# Altium PCB arduino shield.PcbDoc
Units mil, origin at the board's own origin, x right, y up, seen from the top; angles counter-clockwise.
Board outline 2633.58 x 2028.84 mil, 2 copper layers (Top Layer, Bottom Layer); 15 components, 27 nets, 62 pads, 25 vias.
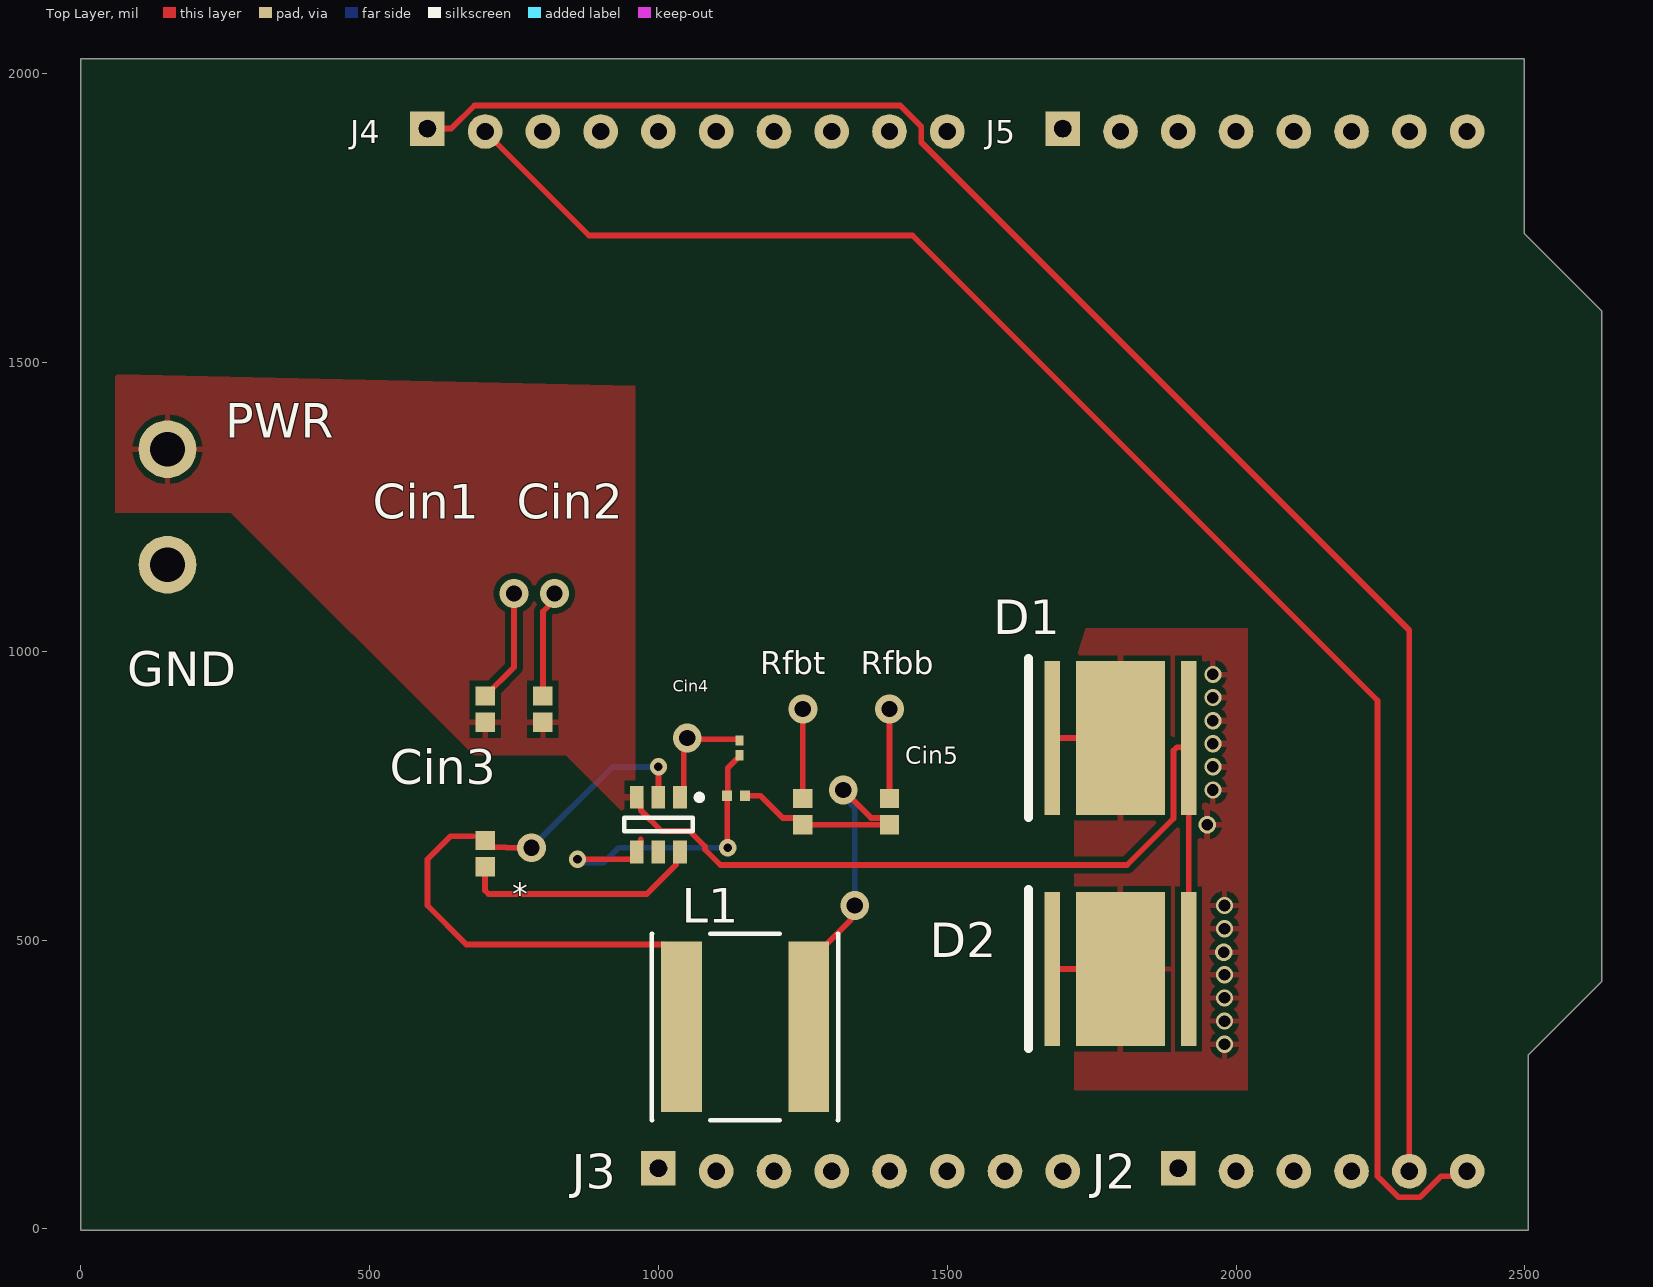
[diagram p0: Top Layer view]
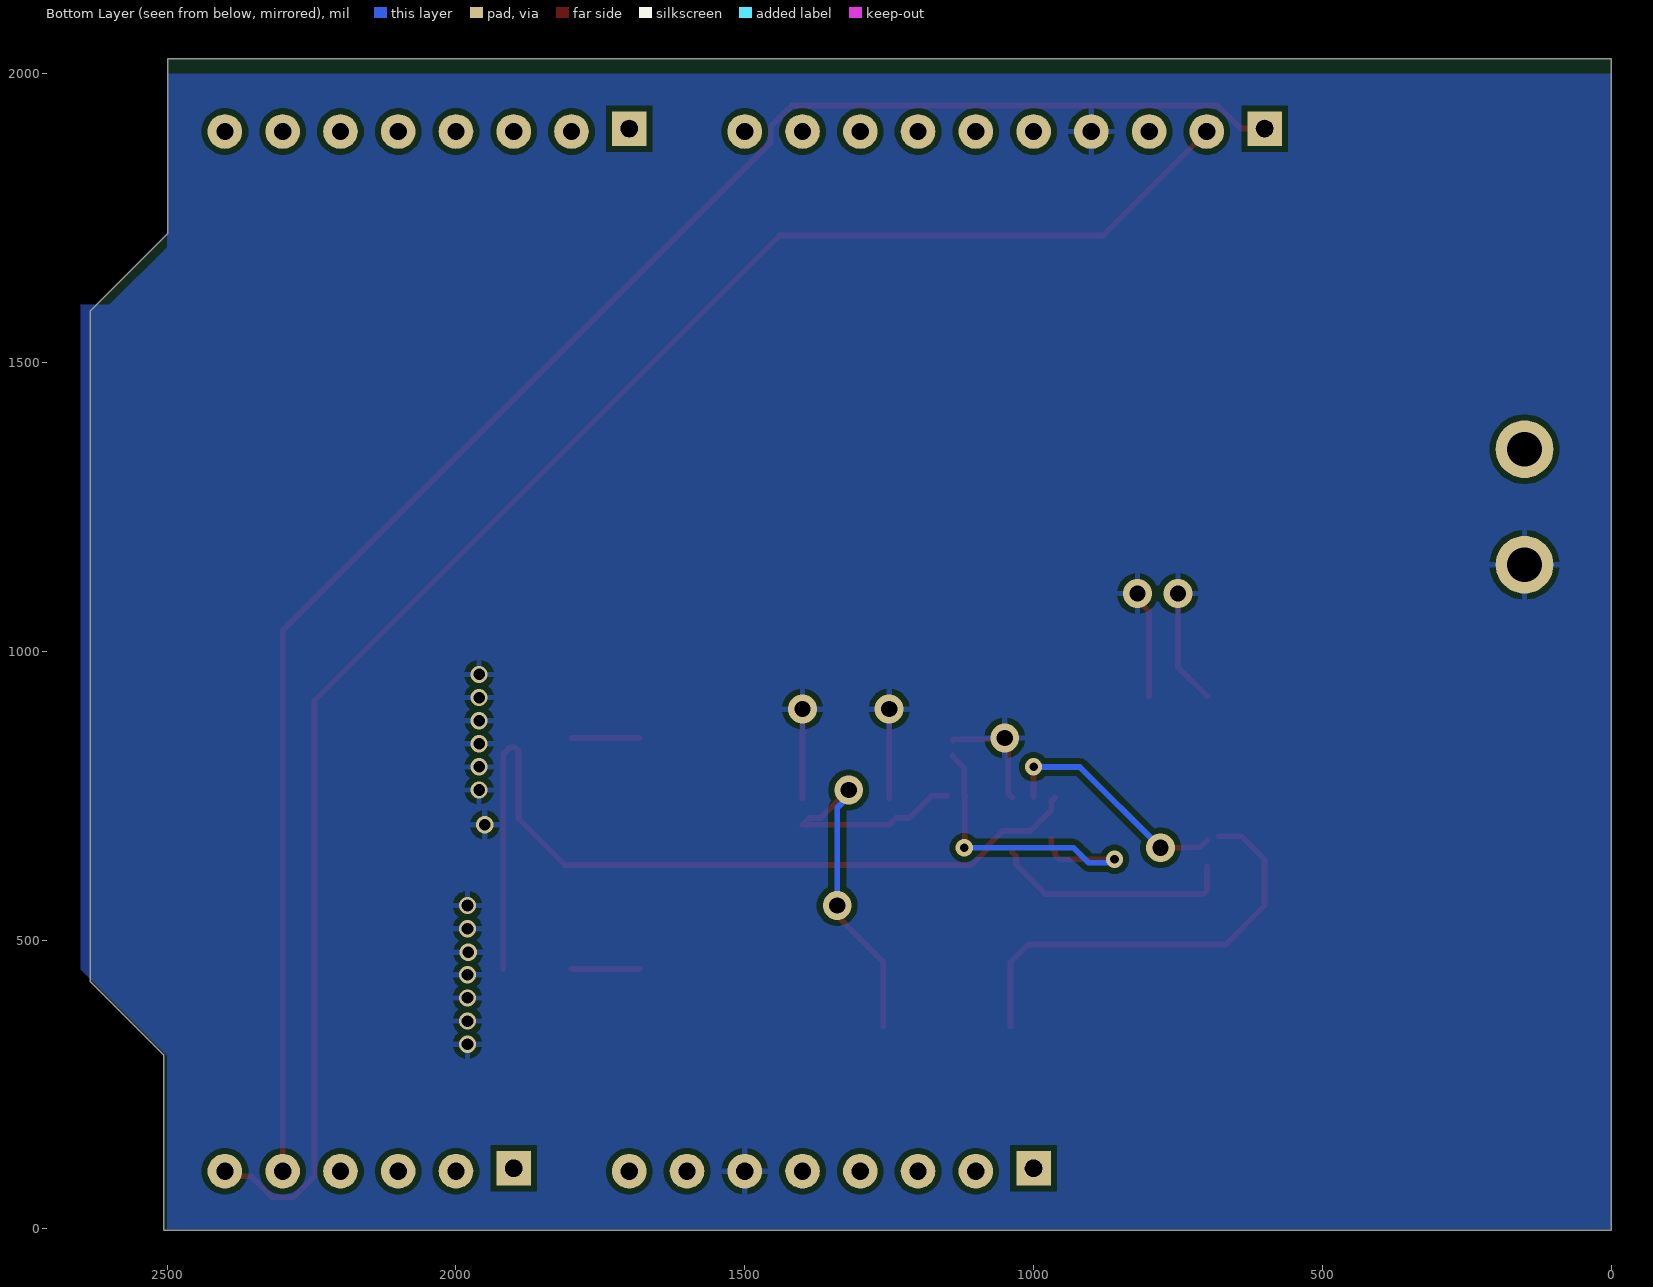
[diagram p1: Bottom Layer view, seen from below]
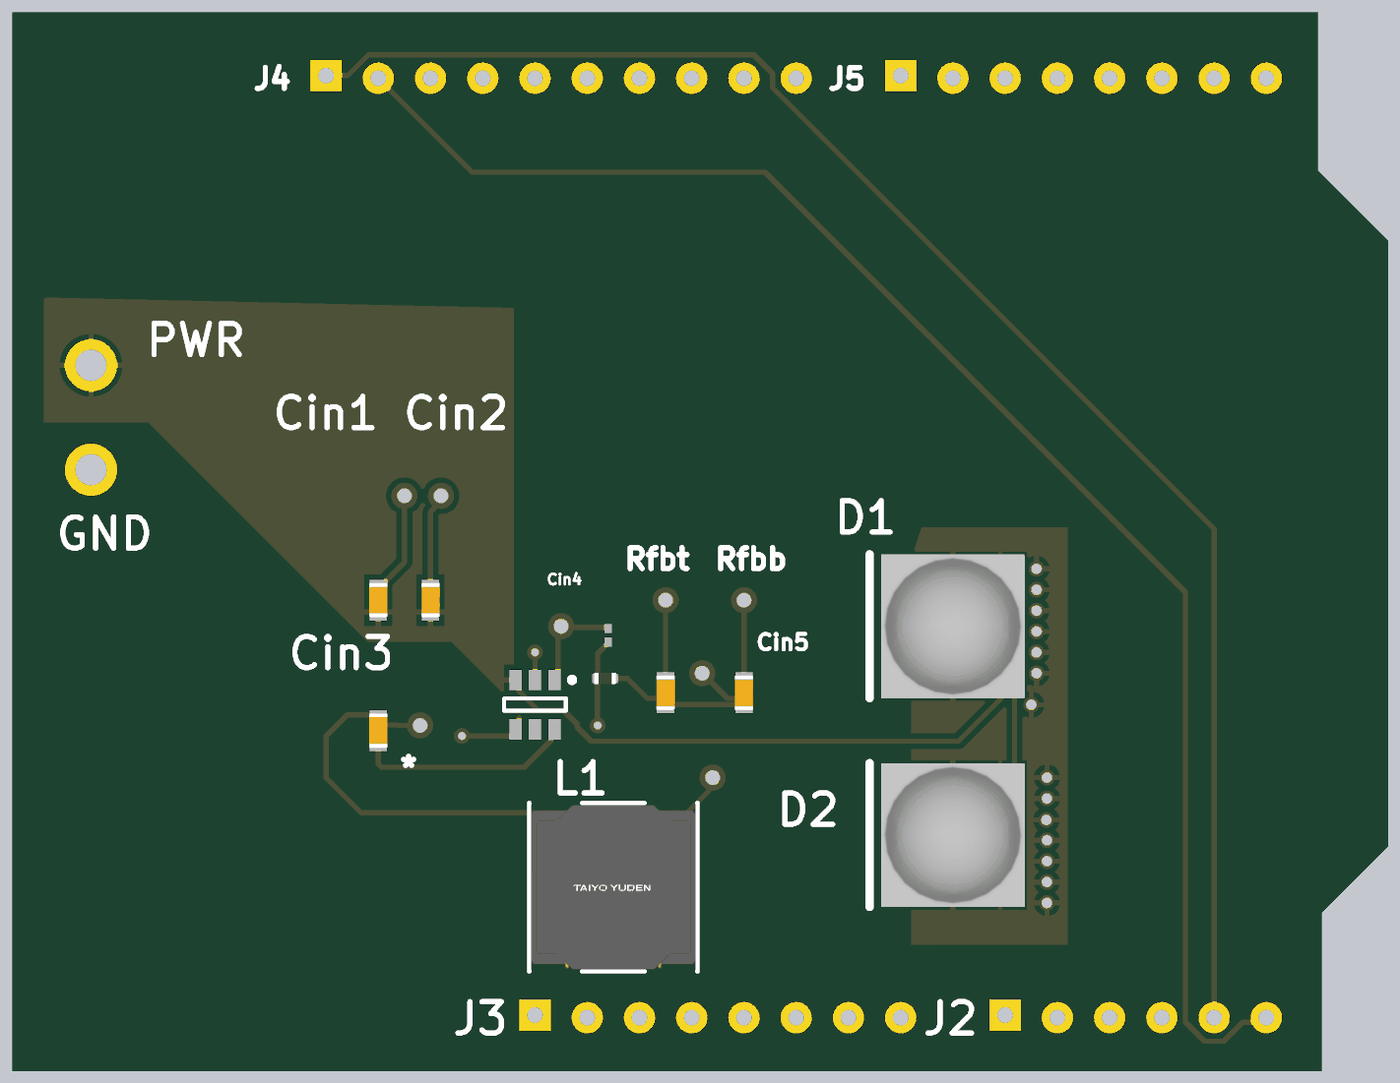
[diagram p2: 3D render of the assembled board from above, using the file's embedded part models]

## Layer stack, top to bottom
Top Solder: solder mask 0.4, Solder Resist, Dk 3.5
Top Layer: signal copper 1.4
Dielectric 1: dielectric 12.6, FR-4, Dk 4.8
Bottom Layer: signal copper 1.4
Bottom Solder: solder mask 0.4, Solder Resist, Dk 3.5

## Board outline
-0.49,-2.47 -0.49,2026.37 2498.82,2026.37 2498.82,1723.33 2633.08,1589.07 2633.08,428.55 2505.86,301.33 2505.86,-2.47

## Design rules (kind name [scope] priority, off if disabled: settings)
Clearance [All] p1: gap=10 ignorepadtopadclearanceinfootprint=FALSE except(0: Arc-Hole Track-Hole SMDPad-Hole THPad-Hole Via-Hole Fill-Hole Poly-Hole Region-Hole Text-Hole; 5: SMDPad-SMDPad)
HoleToHoleClearance [All] p1: gap=5 allowstackedmicrovias=TRUE
MinimumSolderMaskSliver "min solder mask clearance between pads and layers " [OnLayer('Top Layer') vs InPadClass('All Pads')] p1: minsoldermaskwidth=5
MinimumSolderMaskSliver "min solder maks sliver betwene pads " [InPadClass('All Pads') vs InPadClass('All Pads')] p2: minsoldermaskwidth=3
MinimumSolderMaskSliver "min solder mask cleafrance between layers " [OnLayer('Top Layer') vs OnLayer('Bottom Layer')] p3: minsoldermaskwidth=2
PolygonConnect [All] p1: connectstyle=Relief reliefconductorwidth=10 reliefentries=4 polygonreliefangle="90 Angle" airgapwidth=10
RoutingVias [All] p1: holewidth=10 width=18 viastyle="Through Hole" minholewidth=6 minwidth=14 maxholewidth=28 maxwidth=50
SilkToSilkClearance [All] p1: silktosilkclearance=5
SolderMaskExpansion [All] p1: expansion=1 istentingtop=FALSE
Width [All] p1: maxlimit=10 minlimit=10 preferedwidth=10
27 further rules are at their usual default settings.

## Components (designator, comment, footprint, x,y, rotation, side; value= is the part's Value field where it differs from the comment)
* "TPS562200DDCR" SOT95P245X110-6N 1000,700 r270 top
Cin1 "Capacitor 1 uF +/- 10% 25 V 0603" CAPC1608X90X40LL10T20 700,900 r90 top value=1µF
Cin2 "Capacitor 1 uF +/- 10% 25 V 0603" CAPC1608X90X40LL10T20 800,900 r90 top value=1µF
Cin3 "Capacitor 1 uF +/- 10% 25 V 0603" CAPC1608X90X40LL10T20 700,650 r270 top value=1µF
Cin4 "Capacitor 1 uF +/- 10% 25 V 0603" CAPC1608X90X40LL10T20 1250,722.64 r90 top value=1µF
Cin5 "Capacitor 1 uF +/- 10% 25 V 0603" CAPC1608X90X40LL10T20 1400,722.64 r90 top value=1µF
D1 "MKRAWT-00-0000-0D0HG235H" CREE-MK-R-2_V 1800,850 r180 top
D2 "MKRAWT-00-0000-0D0HG235H" CREE-MK-R-2_V 1800,450 r180 top
J2 "samtec_1_6 headers" "samtec_1_6 headers-Footprint-1" 1900,105 r0 top (schematic designator "6 pin connector")
J3 "1_8 pin headeer" "1_8_Pin headers-Footprint-1"#1 1300,105 r0 top (schematic designator "8 pin connector")
J4 "10 pin connector" "10 pin connector-Footprint-1" 855,1605 r0 top (schematic designator "10 pin connector")
J5 "1_8 pin headeer" "1_8_Pin headers-Footprint-1"#2 2000,1905 r0 top (schematic designator "8 pin connector_2")
L1 "NRS8030T3R3MJGJ" FP-NRS8030-MFG 1150,350 r0 top
Rfbb "ERJ2RKF1002X" RESC1005X40X25LL05T05 1134.25,750 r180 top
Rfbt "CRCW020156K2FNED" RESC0603X28X15NL05T05 1140,832.8 r90 top

## Footprints (in the part's own frame and the unit in brackets; to place one, negate y for a bottom-side part, rotate by r counter-clockwise, add the part's x,y. Pads: shape width x height; smd on the part's side, far side on the other; paste and mask are expansions set on the pad)
"1_8_Pin headers-Footprint-1"#1 [mil]
  rect 60x60 hole 30: 1(-300,0)
  round 60 hole 30: 2(-200,-5) 3(-100,-5) 4(0,-5) 5(100,-5) 6(200,-5) 7(300,-5) 8(400,-5)
"1_8_Pin headers-Footprint-1"#2 [mil]
  rect 60x60 hole 30: 1(-300,0)
  round 60 hole 30: 2(-200,-5) 3(-100,-5) 4(0,-5) 5(100,-5) 6(200,-5) 7(300,-5) " "(400,-5)
"10 pin connector-Footprint-1" [mil]
  rect 60x60 hole 30: 1(-255,300)
  round 60 hole 30: 2(-155,295) 3(-55,295) 4(45,295) 5(145,295) 6(245,295) 11(345,295) 12(445,295) 13(545,295) 14(645,295)
CAPC1608X90X40LL10T20 [mm] "Chip Capacitor, 2-Leads, Body 1.70x0.90mm, IPC High Density"
  rect 0.85x0.85 smd: 1(-0.575,0) 2(0.575,0)
  body extent -0.85,-0.45 0.85,0.45, height 0.9
CREE-MK-R-2_V [mm] "SMD, 2-Leads, Body 7x7mm, Thermal Pad 3.9x6.76mm"
  rect 0.7x6.76 smd: 1(-3,0) 2(3,0)
  rect 3.9x6.76 smd: 3(0,0)
  silkscreen extent 4.05,-3.5 4.05,3.5, body extent -3.5,-3.5 3.5,3.5, height 4.1
FP-NRS8030-MFG [mm]
  rect 1.8x7.5 smd paste+0 mask+0: 1(-2.8,0) 2(2.8,0)
  silkscreen extent -4.1,-4.1 4.1,4.1, body extent -4.2,-4.2 4.2,4.2, height 0.25
RESC0603X28X15NL05T05 [mm] "Chip Resistor, 2-Leads, Body 0.60x0.30mm, IPC Medium Density"
  rect 0.45x0.35 smd: 1(-0.325,0) 2(0.325,0)
  body extent -0.33,-0.17 0.33,0.18, height 0.28
RESC1005X40X25LL05T05 [mm] "Chip Resistor, 2-Leads, Body 1.05x0.55mm, IPC High Density"
  rect 0.45x0.45 smd: 1(-0.4,0) 2(0.4,0)
  body extent -0.53,-0.28 0.53,0.28, height 0.4
"samtec_1_6 headers-Footprint-1" [mil]
  rect 60x60 hole 30: 1(0,0)
  round 60 hole 30: 2(100,-5) 3(200,-5) 4(300,-5) 5(400,-5) 6(500,-5)
SOT95P245X110-6N [mm] "SOT23, 6-Leads, Body 2.90x2.45mm, Pitch 0.95mm, IPC Medium Density"
  rect 1x0.6 smd: 1(-1.2,0.95) 2(-1.2,0) 3(-1.2,-0.95) 4(1.2,-0.95) 5(1.2,0) 6(1.2,0.95)
  silkscreen extent -1.32,-1.5 0.3,1.93, body extent -0.7,-1.5 0.7,1.5, height 1.1

## Part data
*: library part CMP-019-00051-1, "Switching Regulator, 2A, 650kHz Switching Freq-Max, PDSO6", Max Input Voltage=17V, Max Operating Temperature=85°C, Max Output Current=4.3A, Min Input Voltage=4.5V, Min Operating Temperature=-40°C, Nominal Input Voltage=12V, Package Body Material=Plastic, Package Code=TSSOP, Package Shape=Rectangular, Package Style="SMALL OUTLINE, THIN PROFILE, SHRINK PITCHMeter", Peak Reflow Temperature (Cel)=260°C, Switching Frequency-Max=650kHz, Temperature Grade=INDUSTRIAL, Analog IC - Other Type="SWITCHING REGULATOR", Control Technique="PULSE WIDTH MODULATION", Height - Seated (Max)=1.1mm, JESD-30 Code=R-PDSO-G6, JESD-609 Code=e3, Length=2.9mm, Moisture Sensitivity Level=1, Number of Functions=1, Number of Pins=6, Reach SVHC Compliant=Yes, RoHS Compliant=Yes, Surface Mount=Yes, Switcher Configuration=BUCK, Terminal Finish=Tin, Terminal Form="Gull Wing", Terminal Pitch=0.95mm, Terminal Position=DUAL, Width=1.6mm
Cin1 Cin2 Cin3 Cin4 Cin5: library part CMP-001-00005-6, "Chip Capacitor, 1 uF, +/- 10%, 25 V, 0603 (1608 Metric)", Capacitor Type=Ceramic, Case/Package=0603, Max Operating Temperature=125°C, Min Operating Temperature=-55°C, Tolerance=10%, Voltage Rating=25V, Mounting Technology=SM, Pins=2, RoHS Compliant=True
D1 D2: library part CMP-2100-00977-1, "LED, White, 12 V, 2-Pin SMD, RoHS, Tape and Reel"
J2: library part CMP-002-00071-1, "1 row 6 pin headers with 1.27mm radius for arduino shield"
J3 J5: library part 1_8pin_headers-1, "Board Connector, 8 Contact(s), 1 Row(s), Female, 0.049 inch Pitch, Crimp Terminal, Locking, Receptacle", Contact Resistance=20mR, Dielectric Withstanding Voltage (AC)=1.5kV, Flammability Rating="UL94 V-0", Insulation Color=Black, Insulation Resistance=100MR, Max Operating Temperature=85°C, Min Operating Temperature=-40°C, Rated Current (Signal)=5A, Additional Feature="ROHS COMPLIANT", Board Mounting Option=PEG, Body Breadth=0.126inch, Body Depth=0.156inch, Body Length=0.463inch, Body/Shell Style=RECEPTACLE, Connector Type="BOARD CONNECTOR", Contact Finish - Mating="NOT SPECIFIED", Contact Finish - Termination="Tin (Sn)", Contact Gender=Female, Contact Material="Copper Alloy", Contact Pattern=RECTANGULAR, Contact Style="SQ PIN-SKT", DIN Conformance=No, Durability=25Cycles, Filter Feature=No, IEC Conformance=No, Insulation Material=Polyester, JESD-609 Code=e3, Mating Contact Pitch=0.049inch, Mating Contact Row Spacing=0.118inch, Mating Information="MULTIPLE MATING PARTS AVAILABLE", MIL Conformance=No, Mixed Contacts=No, Mount=Board, Mounting Option 1=LOCKING, Mounting Style=STRAIGHT, Number Of Connectors=1, Number of Contacts=8, Number Of PCB Rows=2, Number of Rows Loaded=1, Option="General Purpose", PCB Contact Pattern=RECTANGULAR, PCB Contact Row Spacing=4.6228mm, Polarization Key="POLARIZED HOUSING", Reach SVHC Compliant=Yes, Reference Standard=UL, Reliability=COMMERCIAL, RoHS Compliant=Yes, Terminal Pitch=1.25mm, Termination=Crimp
J4: library part CMP-002-00074-1, "10pin connector", Max Operating Temperature=85°C, Min Operating Temperature=-40°C, Connector Type="BOARD CONNECTOR", RoHS Compliant=Yes
L1: library part CMP-14484-000405-1, "Inductor Power Shielded Wirewound 3.3uH 20% 100KHz Ferrite 4.2A 24.7mΩ DCR T/R", Case/Package=Nonstandard, Current Rating=4.3A, DC Resistance (DCR)=19mR, Inductance=3.3uH, Inductance Tolerance=20%, Max DC Current=4.2A, Max Operating Temperature=125°C, Min Operating Temperature=-25°C, Package Quantity=1000, Resistor Type=Wirewound, Self Resonant Frequency=50MHz, Test Frequency=100kHz, Core Material=Ferrite, Depth=8.2mm, Halogen Free="Halogen Free", Height=3mm, Height - Seated (Max)=0.118inch, Lead Free="Lead Free", Lead Pitch=5.6mm, Length=8mm, Mount="Surface Mount", Number of Pins=2, Packaging="Tape and Reel", Radiation Hardening=No, REACH SVHC="No SVHC", RMS Current (Irms)=4.3A, RoHS Compliant=Yes, Saturation Current=4.2A, Series=NRS, Shielding=Shielded, Termination=SMD/SMT, Tolerance=20%, Width=0.315inch
Rfbb: library part CMP-2000-07588-1, "Chip Resistor, 10 KOhm, +/- 1%, 0.1 W, -55 to 155 degC, 0402 (1005 Metric), RoHS, Tape and Reel", Case Code (Imperial)=0402, Case Code (Metric)=1005, Manufacturer=Panasonic, Max Operating Temperature=155degC, Max Power Dissipation=100mW, Min Operating Temperature=-55degC, Package Description="2-Pin Surface Mount Device, Body 1 x 0.5 mm", Package Quantity=1, Package Reference=402, Resistance=10KOhm, Temperature Coefficient=100ppm\/degreesC, Tolerance=1%, Voltage Rating=50V, Case\/Package=0402, Composition=ThickFilm, Contact Plating=Tin, Datasheet URL=https://industrial.panasonic.com/cdbs/www-data/pdf/RDA0000/AOA0000C304.pdf, Datasheet Version=02/2017, Depth=0.5mm, Height=0.35mm, Lead Free=LeadFree, Length=1mm, Manufacturer URL=http://www.panasonic.com/, Military Standard=Not, Mount=SurfaceMount, Mounting Technology=SurfaceMount, Number of Pins=2, Number of Terminations=2, Packaging=TapeandReel, Power Rating=100mW, Radiation Hardening=No, REACH SVHC=NoSVHC, RoHSCompliant=True, Termination=SMD/SMT, Voltage Rating (DC)=50V, Width=0.02inch
Rfbt: library part CMP-2004-00723-1, Manufacturer="Vishay Dale", Part Number=CRCW020156K2FNED

## Free pads (board coordinates)
  round 100 hole 60: 15(150,1150) 15(150,1350)

## Via types
v1: diameter 30, hole 20, Top Layer to Bottom Layer, tented top, 14 vias
v2: diameter 50/50 (per signal layer), hole 28, Top Layer to Bottom Layer, tented top, 6 vias
v3: diameter 30, hole 15, Top Layer to Bottom Layer, tented top, 3 vias
v4: diameter 50, hole 28, Top Layer to Bottom Layer, tented top, 2 vias

## Nets (pads, with @x,y where several pads share a name; then routed paths per layer and width w, separated by ;. In a path a pad name is that pad's centre, name@x,y a point inside that pad or via, vN(x,y) a via of type N, cw(c..) or ccw(c..) an arc to the next point about the centre after c; other vN are vias at no path point)
3.3V: J3.4
12V: *.3 Cin1.1 Cin2.1 D1.1 D2.1 pad.15@150,1350 | length 1546.5
  Top Layer w10: *.3 969.41,740.43 969.41,725.13 1005.54,689 1053.87,689 1080.72,662.14 1080.72,656.85 1107.57,630 1811.06,630 1891.77,710.72 1891.77,828.23 1897.63,834.09 1905.91,834.09 1918.11,821.89 D2.1
+5: Cin4.1 Cin5.1 L1.2 Rfbb.1 | length 826.9
  Top Layer w10: Rfbb.1 1176.93,750 1215.2,711.73 1238.27,711.73 Cin4.1 Cin5.1 1388.27,711.73 1368.27,711.73 v2(1320,760) ; L1.2 1260.24,462.2 1332.35,534.31 1332.35,552.35 v4(1340,560)
  Bottom Layer w10: v2(1320,760) 1320,749.18 1340,729.18 v4(1340,560)
+5V: J3.5
A0: J2.1
A1: J2.2
A2: J2.3
A3: J2.4
A4: J2.5 J4.1 | length 3045.3
  Top Layer w10: J4.1 641.36,1905 681.36,1945 1418.64,1945 1455,1908.64 1455,1881.36 2300,1036.36 J2.5
A5: J2.6 J4.2 | length 2965.3
  Top Layer w10: J4.2 880,1720 1440,1720 2245,915 2245,91.36 2281.36,55 2318.64,55 2355,91.36 2391.36,91.36 J2.6
AREF: J4.3
D2: J5.6
D3: J5.5
D4: J5.4
D5: J5.3
D6: J5.2
D7: J5.1
D12: J4.6
D13: J4.5
EN: *.5
GND: *.1 Cin1.2 Cin2.2 Cin4.2 Cin5.2 D1.2 D1.3 D2.2 D2.3 J3.6 J4.4 pad.15@150,1150 Rfbt.2 | length 1129.4
  Top Layer w10: Cin1.2 750,972.64 v2(750,1100) ; Cin2.2 800,1069.18 820,1089.18 v2(820,1100) ; *.1 1043.7,753.54 1043.7,843.7 v2(1050,850) 1052.2,847.8 1138.11,847.8 1140,845.91 Rfbt.2 ; Cin4.2 v2(1250,900) ; Cin5.2 v2(1400,900) ; D2.2 D2.3 ; D1.2 D1.3
  other v1: 1980,320 1980,360 1980,400 1980,440 1978.75,478.9 1980,520 1980,560 1950,699.69 1960,760 1960,800 1960,840 1960,880 1960,920 1960,960
IOREF: J3.2
N.C: J3.1
Net*_4: *.4 Rfbb.2 Rfbt.1 | length 578.9
  Top Layer w10: v3(860,640) 955.79,640 962.6,646.81 *.4 969.41,659.57 969.41,674.87 ; v3(1120,660) 1119.25,660.75 1119.25,749.25 Rfbb.2 1120,751.5 1120,798.03 1140,818.03 Rfbt.1
  Bottom Layer w10: v3(860,640) 865.82,634.18 905,634.18 930.82,660 v3(1120,660)
Net*_6: *.6 Cin3.2 | length 420.4
  Top Layer w10: Cin3.2 700,585.86 705.86,580 979.95,580 1030.59,630.64 1030.59,645.94 *.6
RESET: J3.3
SW_OUT: *.2 Cin3.1 L1.1 | length 1185
  Top Layer w10: 680,680 640,680 600,640 600,560 667.36,492.64 1009.33,492.64 1039.76,462.2 L1.1 ; Cin3.1 711.73,660.91 736.17,660.91 737.08,660 v4(780,660) ; *.2 v3(1000,800)
  Bottom Layer w10: v4(780,660) 920,800 v3(1000,800)
pads on no net: "J5. " J3.7 J3.8 J4.11 J4.12 J4.13 J4.14 J5.7

## Polygon pours and split planes (outlines as drawn)
GND on Top Layer "GND_L01_P004" (solid, pour order 4): 1720,980 1720,240 2020,240 2020,1040 1740,1040
12V on Top Layer "12V_L01_P005" (solid, pour order 5): 60,1480 60,1240 260,1240 680,820 840,820 940,720 960.18,720 969.41,729.23 960,738.64 960,1460
GND on Bottom Layer "GND_L02_P003" (solid, pour order 3): 2500,0 2500,300 2650,450 2650,1600 2600,1600 2500,1700 2500,2000 0,2000 0,0

## Silkscreen, mask and mechanical layers (free items; w line width, h text height)
Top Overlay:
  text "PWR" at 250,1370 h60
  text "GND" at 80,940 h60
Mechanical 2:
  the board outline again, w0.5